# Altium PCB FEU-102-1_part3.PcbDoc
Units mm, origin at the board's own origin, x right, y up, seen from the top; angles counter-clockwise.
Board outline 20 x 20 mm, 2 copper layers (Top Layer, Bottom Layer), stack 1.021 mm thick; 25 components, 21 nets, 54 pads, 2 vias.
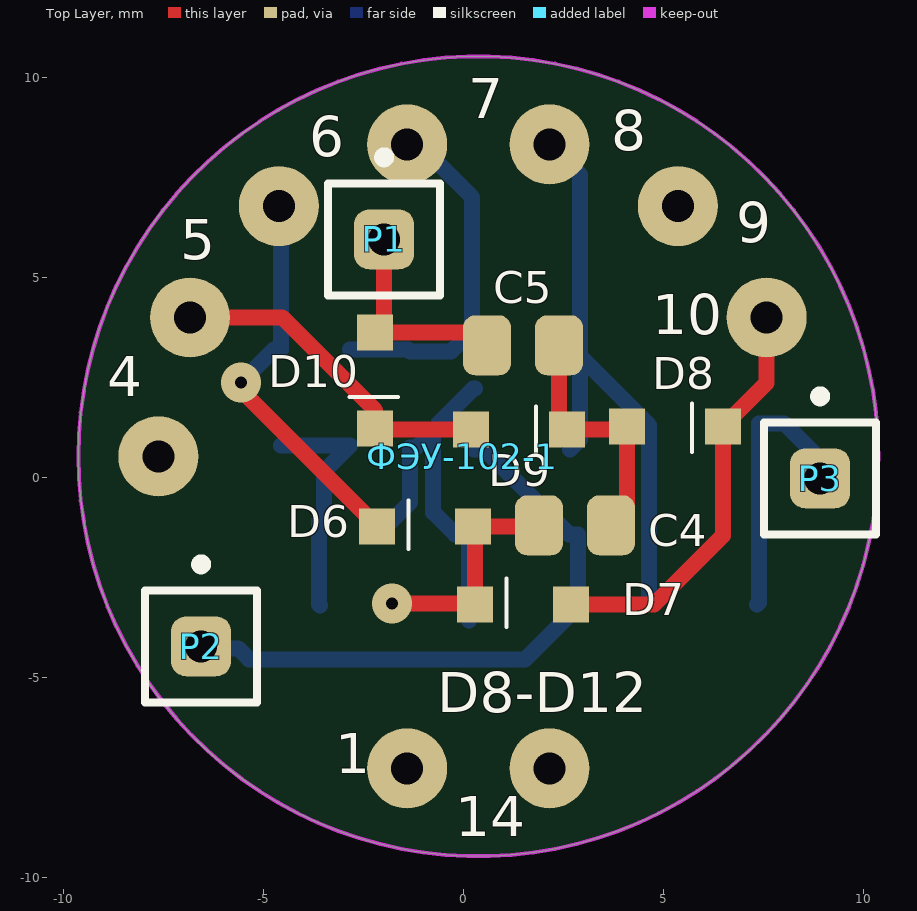
[diagram p0: Top Layer view]
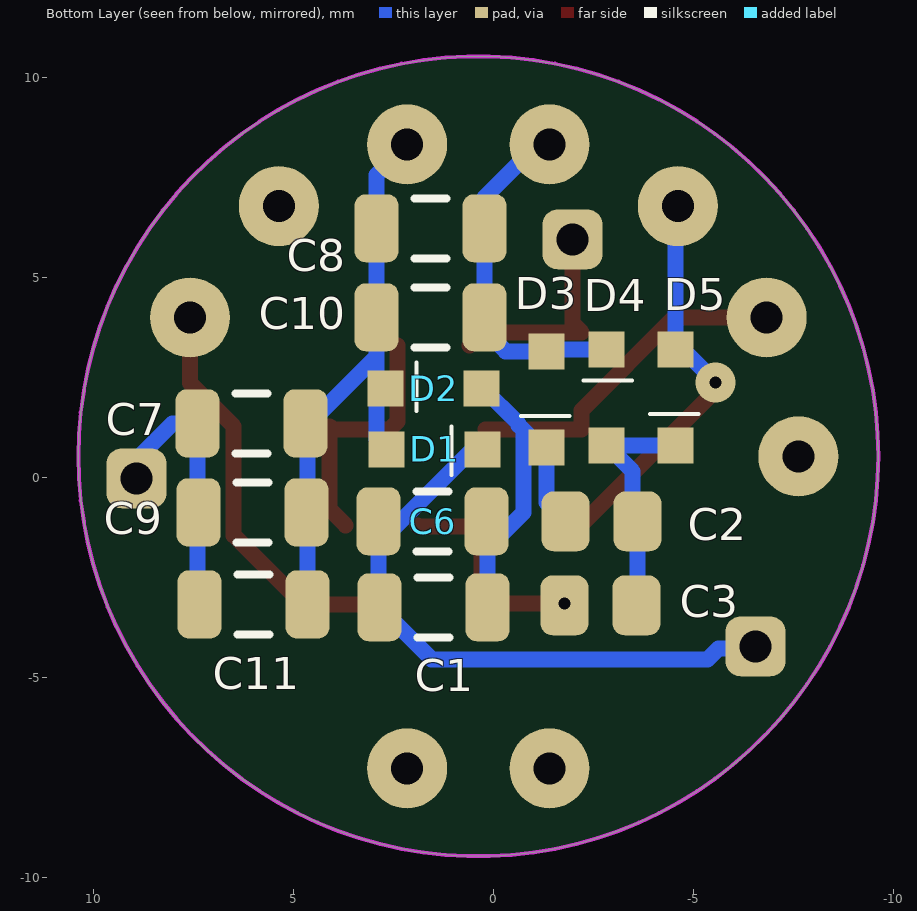
[diagram p1: Bottom Layer view, seen from below]
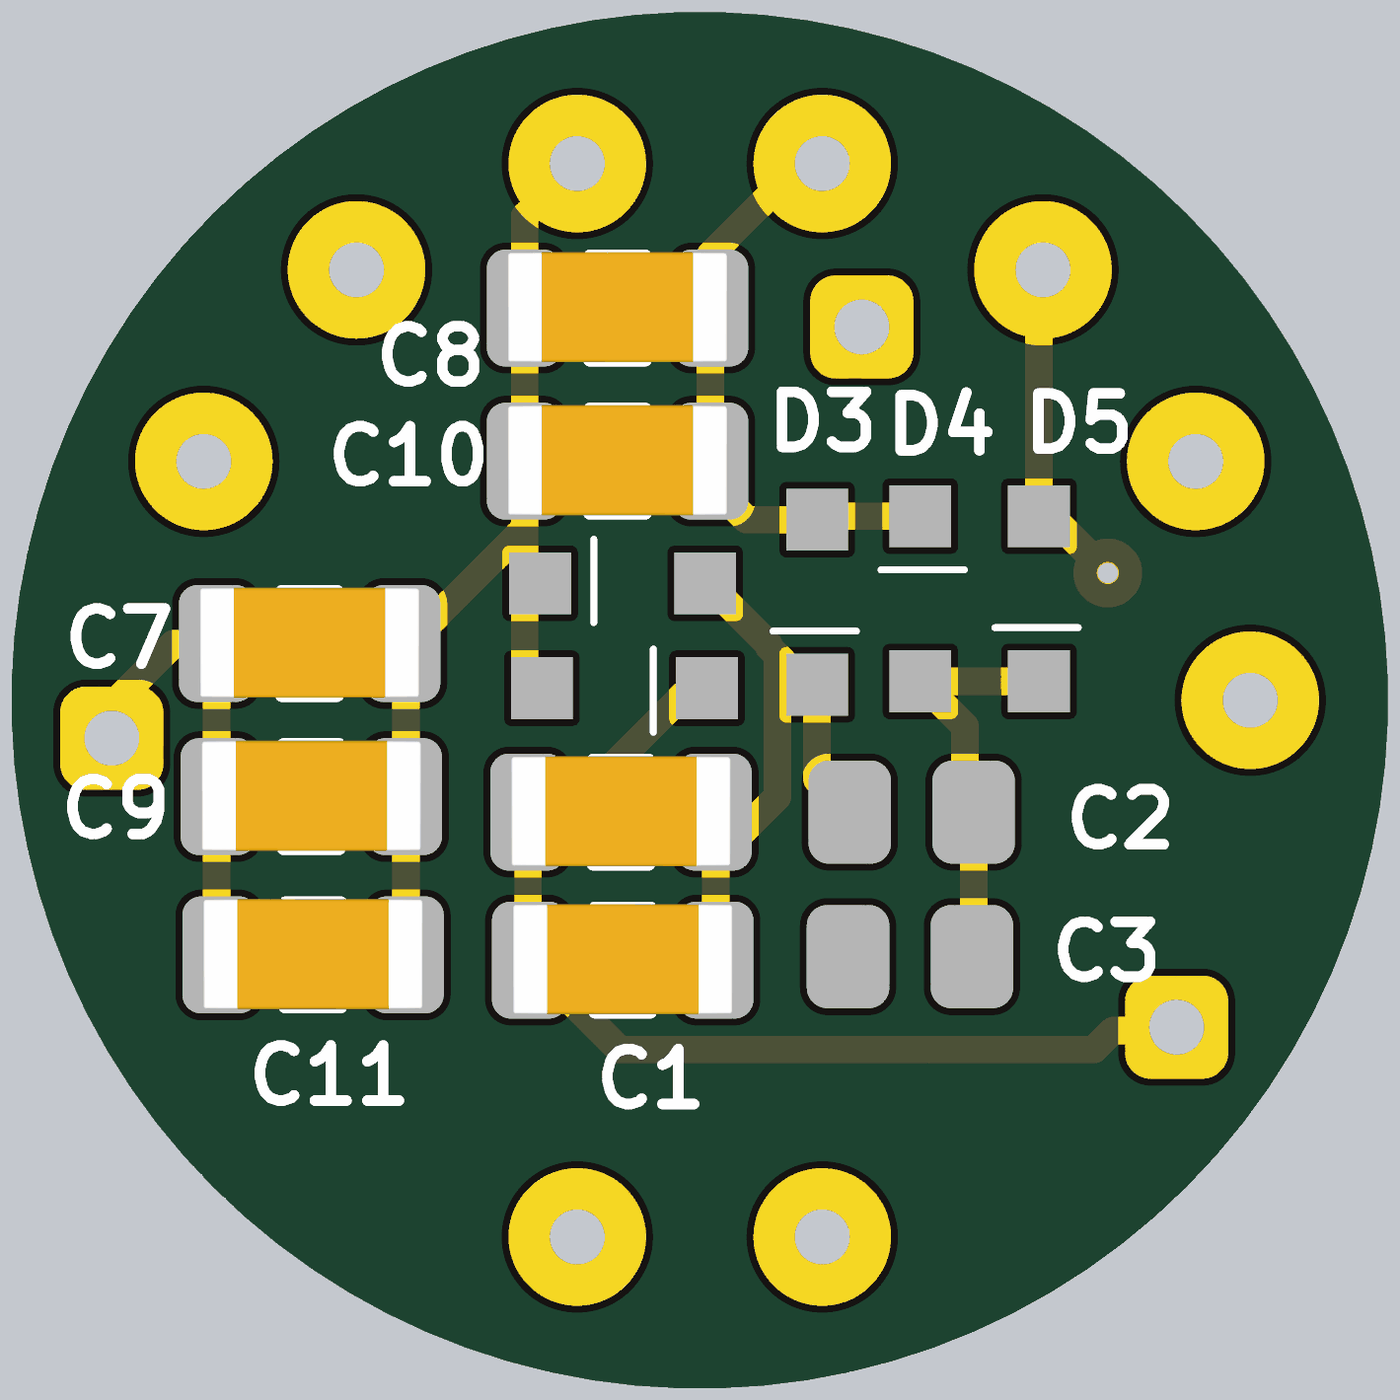
[diagram p2: 3D render of the assembled board from below, using the file's embedded part models]

## Layer stack, top to bottom
Top Solder: solder mask 0.0102, Solder Resist, Dk 3.5
Top Layer: signal copper 0.0356
Dielectric1: dielectric 0.95, FR-4, Dk 4.8
Bottom Layer: signal copper 0.0356
Bottom Solder: solder mask 0.0102, Solder Resist, Dk 3.5

## Board outline
-9.62,0.526 ccw(c0.38,0.526) 0.38,-9.474 ccw(c0.38,0.526) 10.38,0.526 ccw(c0.38,0.526) 0.38,10.526 ccw(c0.38,0.526)

## Design rules (kind name [scope] priority, off if disabled: settings)
Clearance [All] p1: gap=0.25
ComponentClearance [All] p1: gap=0.1 collisioncheckmode=3 verticalgap=0.254 showdistances=TRUE
HoleSize [All] p1: absolutevalues=TRUE maxlimit=2.54 minlimit=0.3 maxpercent=80.000 minpercent=20.000
HoleToHoleClearance [All] p1: gap=0.152 allowstackedmicrovias=TRUE
MinimumAnnularRing [All] p1: minimumring=0.2
MinimumSolderMaskSliver [All] p1: minsoldermaskwidth=0.152
PlaneClearance [All] p1: clearance=2
PlaneConnect [All] p1: planeconnectstyle=Relief reliefexpansion=0.457 reliefentries=4 reliefconductorwidth=0.3 reliefairgap=0.457
PolygonConnect PolygonConnect_via [IsVia] p1: connectstyle=Direct reliefconductorwidth=0.254 reliefentries=4 polygonreliefangle="90 Angle" airgapwidth=0.254
PolygonConnect [All] p2: connectstyle=Relief reliefconductorwidth=0.254 reliefentries=4 polygonreliefangle="90 Angle" airgapwidth=0.254
RoutingVias [All] p1: holewidth=0.3 width=0.62 viastyle="Through Hole" minholewidth=0.3 minwidth=0.62 maxholewidth=6 maxwidth=4
SilkToSilkClearance [All] p1: silktosilkclearance=0.152
SilkToSolderMaskClearance SilkscreenOverComponentPads [IsPad] p1: minsilkscreentomaskgap=0.1 clearancetoexposedcopper=TRUE
SolderMaskExpansion [All] p1: expansion=0.1
Width [All] p1: maxlimit=2.254 minlimit=0.4 preferedwidth=0.4
22 further rules are at their usual default settings.

## Components (designator, comment, footprint, x,y, rotation, side; value= is the part's Value field where it differs from the comment)
C1 "100nF" C1206 1.5,-3.25 r0 bottom
C2 "47nF" 0805_CAP -2.7,-1.1 r0 bottom
C3 "47nF" 0805_CAP -2.675,-3.2 r180 bottom
C4 "47nF" 0805_CAP 2.8,-1.2 r180 top
C5 "47nF" 0805_CAP 1.5,3.3 r0 top
C6 "100nF" C1206 1.525,-1.1 r0 bottom
C7 "100nF" C1206 6.05,1.35 r0 bottom
C8 "100nF" C1206 1.575,6.225 r0 bottom
C9 "100nF" C1206 6.025,-0.875 r0 bottom
C10 "100nF" C1206 1.575,4 r0 bottom
C11 "100nF" C1206 6,-3.175 r0 bottom
D1 "" DA2JF8100L 2.675,0.7 r180 bottom
D2 "" DA2JF8100L 0.3,2.225 r0 bottom
D3 "" DA2JF8100L -1.325,3.15 r270 bottom
D4 "" DA2JF8100L -2.825,0.8 r90 bottom
D5 "" DA2JF8100L -4.55,3.2 r270 bottom
D6 "" DA2JF8100L 0.25,-1.225 r180 top
D7 "" DA2JF8100L 2.7,-3.175 r180 top
D8 "" DA2JF8100L 4.1,1.275 r0 top
D9 "" DA2JF8100L 0.2,1.2 r0 top
D10 "" DA2JF8100L -2.2,3.625 r270 top
P1 "Plug" PIN1 -1.975,5.95 r0 top
P2 "Plug" PIN1 -6.55,-4.225 r0 top
P3 "Plug" PIN1 8.925,-0.025 r0 top
ФЭУ-102-1 "Header 7X2" ФЭУ-102 0.38,0.526 r0 top locked

## Footprints (in the part's own frame and the unit in brackets; to place one, negate y for a bottom-side part, rotate by r counter-clockwise, add the part's x,y. Pads: shape width x height; smd on the part's side, far side on the other; paste and mask are expansions set on the pad)
0805_CAP [mm]
  rrect50% 1.2x1.5 smd: 1(-0.9,0) 2(0.9,0)
  body extent -1.11,-0.72 1.1,0.72, height 0.94
C1206 [mm] "Chip Capacitor, Body 3.2x1.6mm, IPC High Density"
  rrect50% 1.1x1.7 smd: 1(-1.35,0) 2(1.35,0)
  silkscreen extent -0.4,-0.75 0.4,0.75, body extent -1.6,-0.81 1.6,0.79, height 1.6
DA2JF8100L [mm]
  rect 0.9x0.9 smd: 1(0,0) 2(2.4,0)
  silkscreen extent 1.62,-0.64 1.62,0.57, body extent 0.36,-0.65 2.06,0.6, height 0.7
PIN1 [mm] "Connector; Plug"
  rrect50% 1.5x1.5 hole 0.8: 1(0,0)
  silkscreen extent -1.4,-1.4 1.4,2.17
ФЭУ-102 [mm]
  round 2 hole 0.8: 1(-1.78,-7.799) 4(-8,0) 5(-7.208,3.471) 6(-4.988,6.255) 7(-1.78,7.799) 8(1.78,7.799) 9(4.988,6.255) 10(7.208,3.471) 14(1.78,-7.799)
  Keep-Out Layer circle w0.1: c0,0 r10

## Part data
C1 C2 C3 C4 C5 C6 C7 C8 C9 C10 C11: library part "Cap Semi", "Capacitor (Semiconductor SIM Model)"
D1 D2 D3 D4 D5 D6 D7 D8 D9 D10: library part Diode, "Default Diode"
ФЭУ-102-1: "Header, 7-Pin, Dual row"

## Via types
v1: diameter 1, hole 0.3, Top Layer to Bottom Layer, tented both sides, 2 vias

## Nets (pads, with @x,y where several pads share a name; then routed paths per layer and width w, separated by ;. In a path a pad name is that pad's centre, name@x,y a point inside that pad or via, vN(x,y) a via of type N, cw(c..) or ccw(c..) an arc to the next point about the centre after c; other vN are vias at no path point)
ANODE: ФЭУ-102-1.9
DINODE1: 
DINODE2: 
DINODE3: 
DINODE4: 
DINODE5: 
DINODE6: 
DINODE7: 
DINODE8: D9.1 D10.2 ФЭУ-102-1.5 | length 8.4
  Top Layer w0.4: ФЭУ-102-1.5 -4.522,3.997 -2.2,1.675 D10.2 ; D10.2@-2.2,1.2 D9.1
DINODE9: D7.1 D8.2 ФЭУ-102-1.10 | length 10.4
  Top Layer w0.4: D7.1 4.775,-3.175 6.5,-1.45 D8.2 7.588,2.363 ФЭУ-102-1.10
DINODE10: D5.1 D6.2 ФЭУ-102-1.6 | length 10
  Top Layer w0.4: v1(-5.55,2.375) -5.55,2.175 D6.2
  Bottom Layer w0.4: v1(-5.55,2.375) -4.725,3.2 D5.1 -4.55,6.722 ФЭУ-102-1.6
DINODE11: C8.1 C10.1 D3.1 D4.2 ФЭУ-102-1.7 | length 8.8
  Bottom Layer w0.4: D4.2 -1.375,3.2 D3.1 -0.3,3.15 0.225,3.675 C10.1 C8.1 0.225,7 -1.1,8.325 ФЭУ-102-1.7
DINODE12: C7.1 C8.2 C9.1 C10.2 C11.1 D1.1 D2.2 ФЭУ-102-1.8 | length 15
  Bottom Layer w0.4: ФЭУ-102-1.8 2.925,7.56 C8.2 C10.2 2.925,3.025 ; D1.1 2.925,0.95 2.925,3.025 ; C11.1 4.65,1.3 2.925,3.025
FOTOKAT: ФЭУ-102-1.1
GND: C7.2 C9.2 C11.2 P3.1 | length 6.6
  Bottom Layer w0.4: C11.2 7.4,-3.125 C7.2 8.025,1.35 P3.1@9.05,0.325
NetC1_1: C1.1 C2.2 C6.1 D2.1 D3.2 | length 9.7
  Bottom Layer w0.4: C2.2 -1.325,-0.625 D3.2 -1.175,0.75 -0.75,1.175 ; C1.1@0.15,-3.575 C1.1 0.15,-1.45 0.175,-1.425 -0.2,-1.425 -0.75,-0.875 -0.75,1.175 ; D2.1 0.264,2.225 -0.625,1.336 -0.625,1.3 -0.75,1.175
NetC2_1: C2.1 C3.2 D4.1 D5.2 | length 6.1
  Bottom Layer w0.4: D5.2 D4.1 -3.475,0.15 -3.475,-0.975 C2.1 -3.6,-3.175 C3.2
NetC3_1: C3.1 C4.2 D6.1 D7.2 | length 5.7
  Top Layer w0.4: v1(-1.775,-3.15) 0.275,-3.15 D7.2 0.3,-1.275 D6.1 1.875,-1.225 C4.2
NetC4_1: C4.1 C5.2 D8.1 D9.2 | length 6.4
  Top Layer w0.4: C5.2 2.4,1.4 D9.2 4.025,1.2 D8.1 4.1,-0.8 C4.1
NetC5_1: C5.1 D10.1 P1.1 | length 5.4
  Top Layer w0.4: P1.1 -1.975,3.85 D10.1 0.275,3.625 C5.1
PUMP: C1.2 C6.2 D1.2 P2.1 | length 15.4
  Bottom Layer w0.4: P2.1 -6.5,-4.275 -5.625,-4.275 -5.35,-4.55 1.55,-4.55 C1.2 ; D1.2 0.525,0.7 2.65,-1.425 2.875,-1.425 C1.2@2.875,-3.25
pads on no net: ФЭУ-102-1.4 ФЭУ-102-1.14

## Silkscreen, mask and mechanical layers (free items; w line width, h text height)
Top Overlay:
  text "7" at 0.125,8.975 h1
  text "8" at 3.7,8.175 h1
  text "6" at -3.85,8.025 h1
  text "9" at 6.825,5.875 h1
  text "5" at -7.075,5.45 h1
  text "10" at 4.725,3.575 h1
  text "4" at -8.9,2.025 h1
  text "D8-D12" at -0.65,-5.875 h1
  text "1" at -3.2,-7.4 h1
  text "14" at -0.2,-8.975 h1